# EAGLE board pretinhaMonitorBoard (EAGLE 9.3.0)
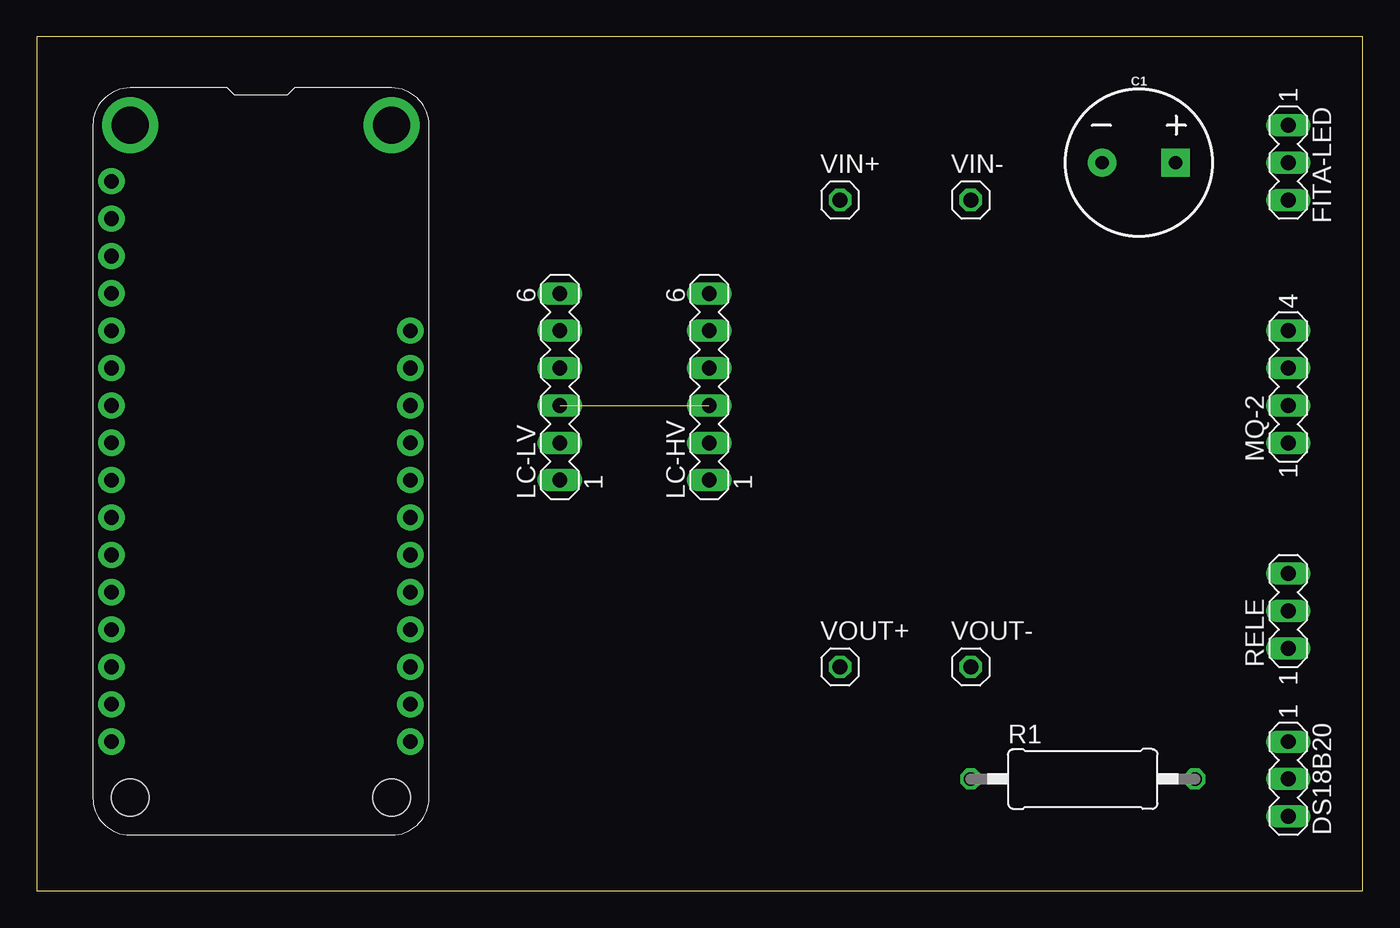
[diagram p0: board, top side]
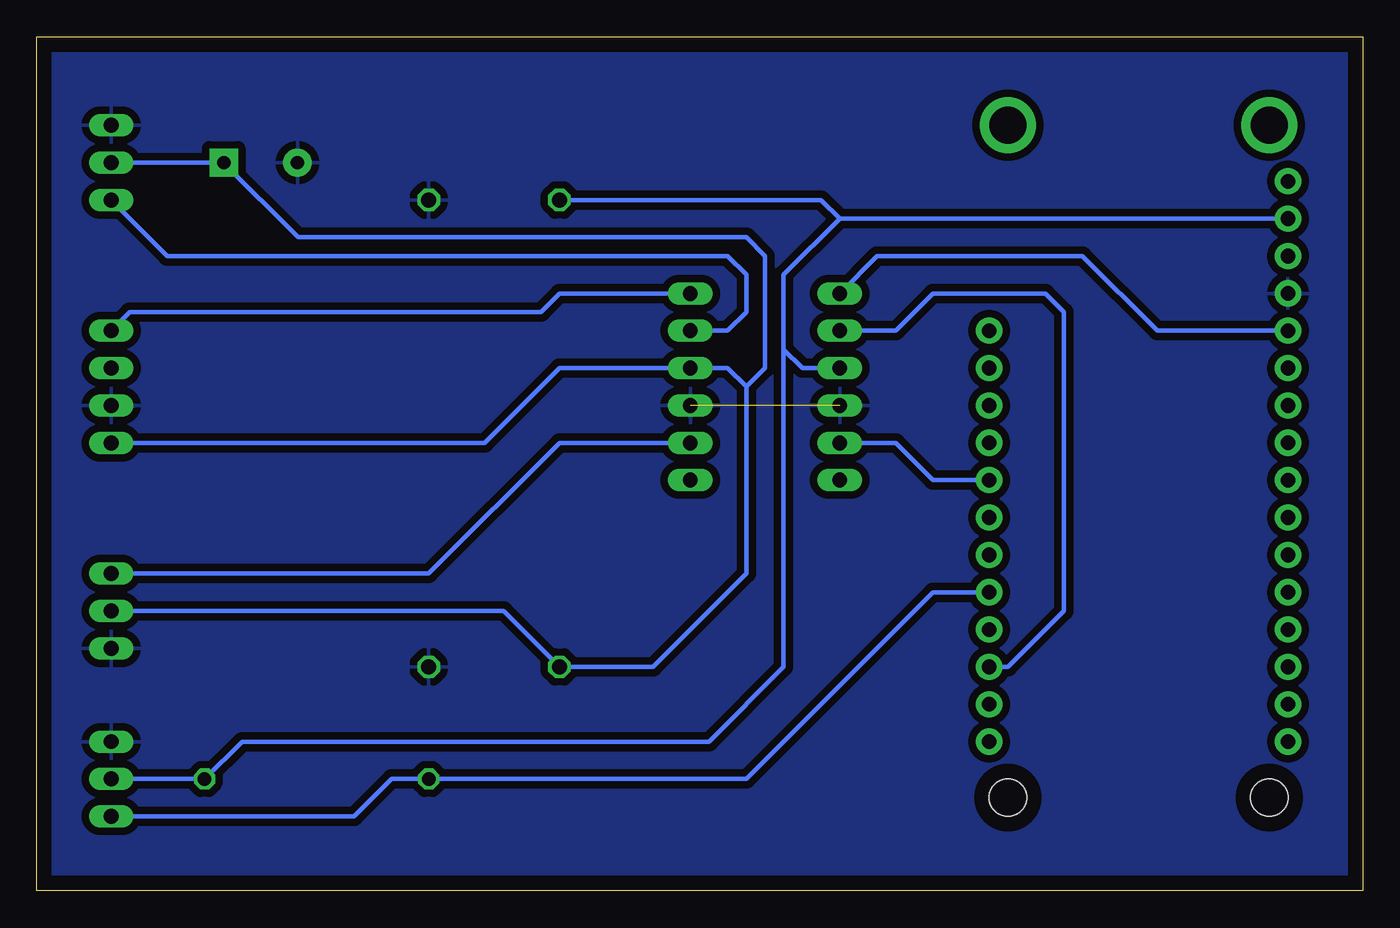
[diagram p1: board, bottom side, seen from below]

Size 90.15 x 58.09 mm. Coordinates in mm from the lower left corner, seen from the top.
Outline: 0,0 90.15,0 90.15,58.09 0,58.09 0,0
Copper layers (1*16): Top 0.035mm / dielectric 1.5mm / Bottom 0.035mm
Design rules "default *": minimum track width 10mil, minimum drill 0.35mm, track to track 20mil, track to pad 20mil, pad to pad 20mil, via to via 20mil, smd to smd 6mil, copper to edge 40mil, drill to drill 6mil, minimum pad ring 10mil, minimum via ring 8mil, stop-mask expansion 4mil, vias tented up to drill 0mil, thermal gap 20mil
Net classes: 0 default: drill 1 mm, clearance 0.381 mm

## Footprints (pad centres in the part's own frame; a part is rotated, then mirrored left to right if it is on the bottom)
CPOL-RADIAL-5MM-10MM = drill 0.9 pad 1.93 square: + 2.5,0 | drill 0.9 pad 1.93: - -2.5,0
MA03-1 = drill 1.016 long: 1 -2.54,0; 2 0,0; 3 2.54,0
MA06-1 = drill 1.016 long: 1 -6.35,0; 2 -3.81,0; 3 -1.27,0; 4 1.27,0; 5 3.81,0; 6 6.35,0
FEATHERWING_DIM = drill 1 pad 1.778: 1 6.35,1.27; 2 8.89,1.27; 3 11.43,1.27; 4 13.97,1.27; 5 16.51,1.27; 6 19.05,1.27; 7 21.59,1.27; 8 24.13,1.27; 9 26.67,1.27; 10 29.21,1.27; 11 31.75,1.27; 12 34.29,1.27; 13 36.83,1.27; 14 39.37,1.27; 15 41.91,1.27; 16 44.45,1.27; 17 44.45,21.59; 18 41.91,21.59; 19 39.37,21.59; 20 36.83,21.59; 21 34.29,21.59; 22 31.75,21.59; 23 29.21,21.59; 24 26.67,21.59; 25 24.13,21.59; 26 21.59,21.59; 27 19.05,21.59; 28 16.51,21.59 | drill 2.5 pad 3.81: P$1 2.54,20.32; P$2 2.54,2.54 | hole 2.54: 48.26,20.32; 48.26,2.54
MA04-1 = drill 1.016 long: 1 -3.81,0; 2 -1.27,0; 3 1.27,0; 4 3.81,0
0411/15 = drill 0.914 octagon: 1 -7.62,0; 2 7.62,0
1X01 = drill 1.016 octagon: 1 0,0

## Placement (x,y rotation side)
C1  1mF  [CPOL-RADIAL-5MM-10MM]  74.93,49.53 0 top
DS18B20  [MA03-1]  85.09,7.62 270 top
FITA-LED  [MA03-1]  85.09,49.53 270 top
LC-HV  [MA06-1]  45.72,34.29 90 top
LC-LV  [MA06-1]  35.56,34.29 90 top
MESH  FEATHERWING_NODIM  [FEATHERWING_DIM]  3.81,54.61 270 top
MQ-2  [MA04-1]  85.09,34.29 90 top
R1  [0411/15]  71.12,7.62 0 top
RELE  [MA03-1]  85.09,19.05 90 top
VIN+  [1X01]  54.61,46.99 0 top
VIN-  [1X01]  63.5,46.99 0 top
VOUT+  [1X01]  54.61,15.24 0 top
VOUT-  [1X01]  63.5,15.24 0 top

## Library data of the parts
C1 = SparkFun-Capacitors; PROD_ID: CAP-09538
DS18B20 FITA-LED LC-HV LC-LV MQ-2 RELE = con-lstb; OC_FARNELL: unknown; OC_NEWARK: unknown
MESH = adafruit
R1 = resistor
VIN+ VIN- VOUT+ VOUT- = pinhead

## Nets
3V3: DS18B20.2 LC-LV.4 MESH.2 R1.2 VIN+.1
5V: C1.+ FITA-LED.2 LC-HV.4 MQ-2.1 RELE.2 VOUT+.1
A0: LC-LV.6 MESH.5
AOUT: LC-HV.6 MQ-2.4
D2: LC-LV.5 MESH.19
D4: DS18B20.3 MESH.21 R1.1
D7: LC-LV.2 MESH.24
DOUT: MQ-2.3
GND: C1.- DS18B20.1 FITA-LED.1 LC-HV.3 LC-LV.3 MESH.4 MQ-2.2 RELE.1 VIN-.1 VOUT-.1
LED: FITA-LED.3 LC-HV.5
RELE: LC-HV.2 RELE.3

## Tracks (layer width: path | path; a pad name or v marks a point on that pad's centre or on a via)
3V3
  Bottom 0.305: LC-LV.4 38.1,35.56 39.37,36.83 | 39.37,36.83 39.37,41.91 35.56,45.72 | 35.56,45.72 MESH.2 | DS18B20.2 R1.2 76.2,10.16 44.45,10.16 39.37,15.24 39.37,36.83 | VIN+.1 36.83,46.99 35.56,45.72
5V
  Bottom 0.305: RELE.2 58.42,19.05 VOUT+.1 48.26,15.24 41.91,21.59 41.91,34.29 | 41.91,34.29 43.18,35.56 LC-HV.4 54.61,35.56 59.69,30.48 MQ-2.1 86.36,30.48 | FITA-LED.2 77.47,49.53 | 77.47,49.53 C1.+ | 41.91,34.29 40.64,35.56 40.64,43.18 41.91,44.45 72.39,44.45 77.47,49.53
A0
  Bottom 0.305: LC-LV.6 33.02,43.18 19.05,43.18 13.97,38.1 MESH.5
AOUT
  Bottom 0.305: LC-HV.6 54.61,40.64 55.88,39.37 83.82,39.37 MQ-2.4
D2
  Bottom 0.305: LC-LV.5 31.75,38.1 29.21,40.64 21.59,40.64 20.32,39.37 20.32,19.05 24.13,15.24 MESH.19
D4
  Bottom 0.305: MESH.21 29.21,20.32 41.91,7.62 R1.1 66.04,7.62 68.58,5.08 DS18B20.3
D7
  Bottom 0.305: LC-LV.2 31.75,30.48 29.21,27.94 MESH.24
GND  (1 unrouted)
  pour Bottom: 0,0 0,58.42 90.17,58.42 90.17,0
LED
  Bottom 0.305: LC-HV.5 43.18,38.1 41.91,39.37 41.91,41.91 43.18,43.18 81.28,43.18 FITA-LED.3
RELE
  Bottom 0.305: LC-HV.2 54.61,30.48 63.5,21.59 RELE.3